# Altium PCB PCB1.PcbDoc
Units mm, origin at the board's own origin, x right, y up, seen from the top; angles counter-clockwise.
Board outline 59.05 x 107.06 mm, 2 copper layers (Top Layer, Bottom Layer); 64 components, 52 nets, 226 pads, 29 vias.
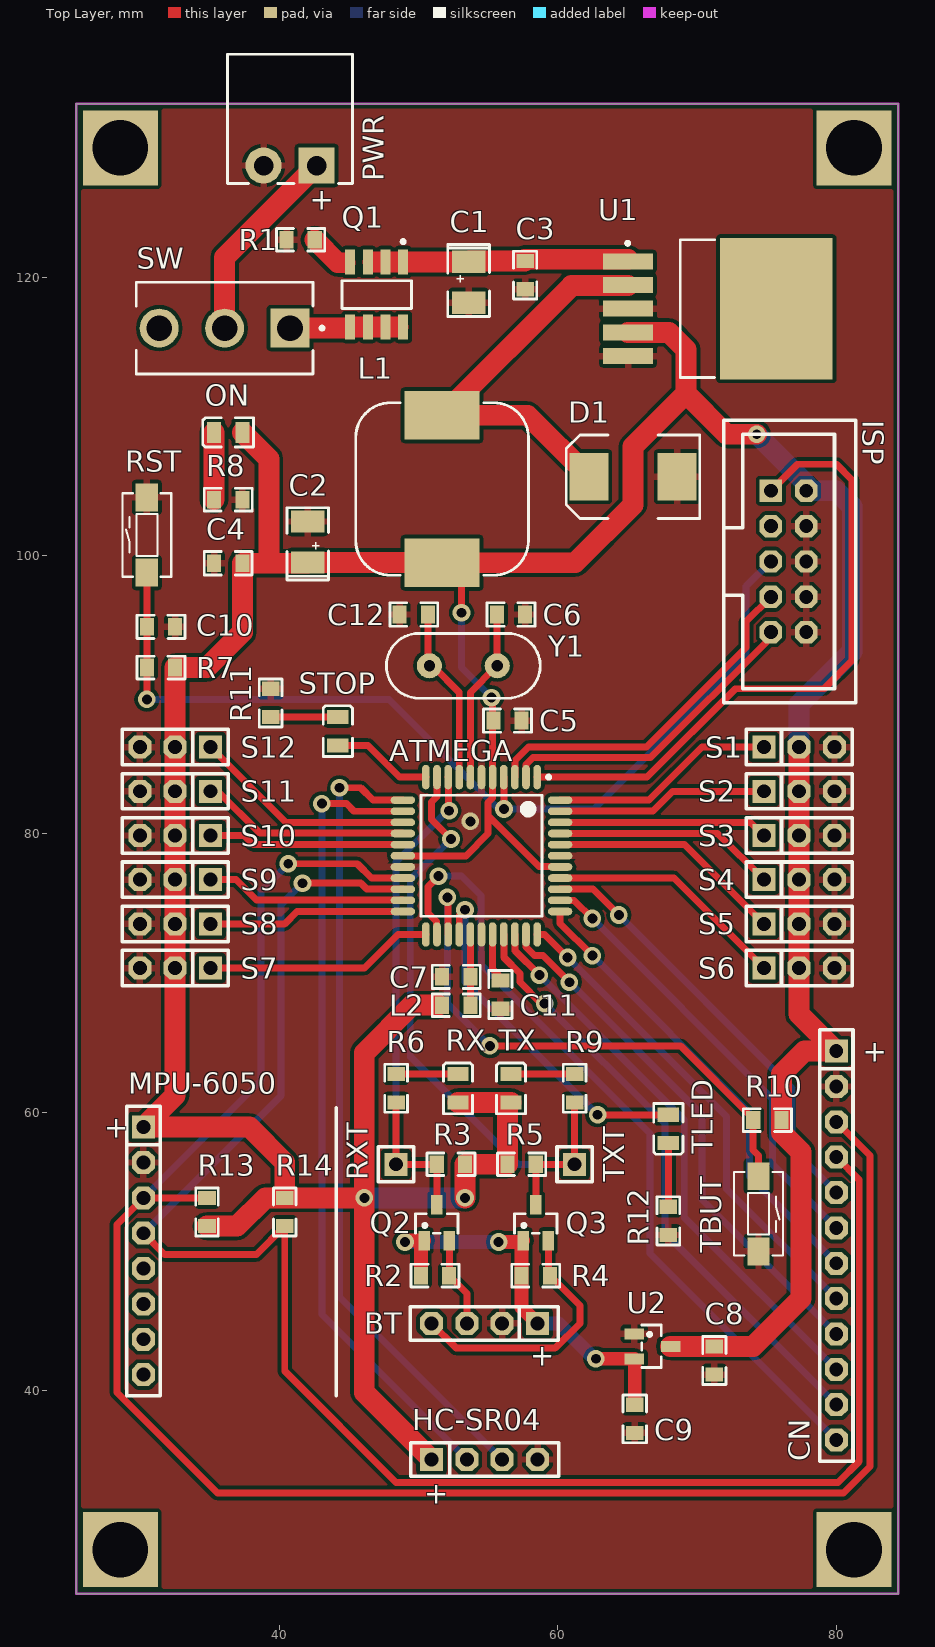
[diagram p0: Top Layer view]
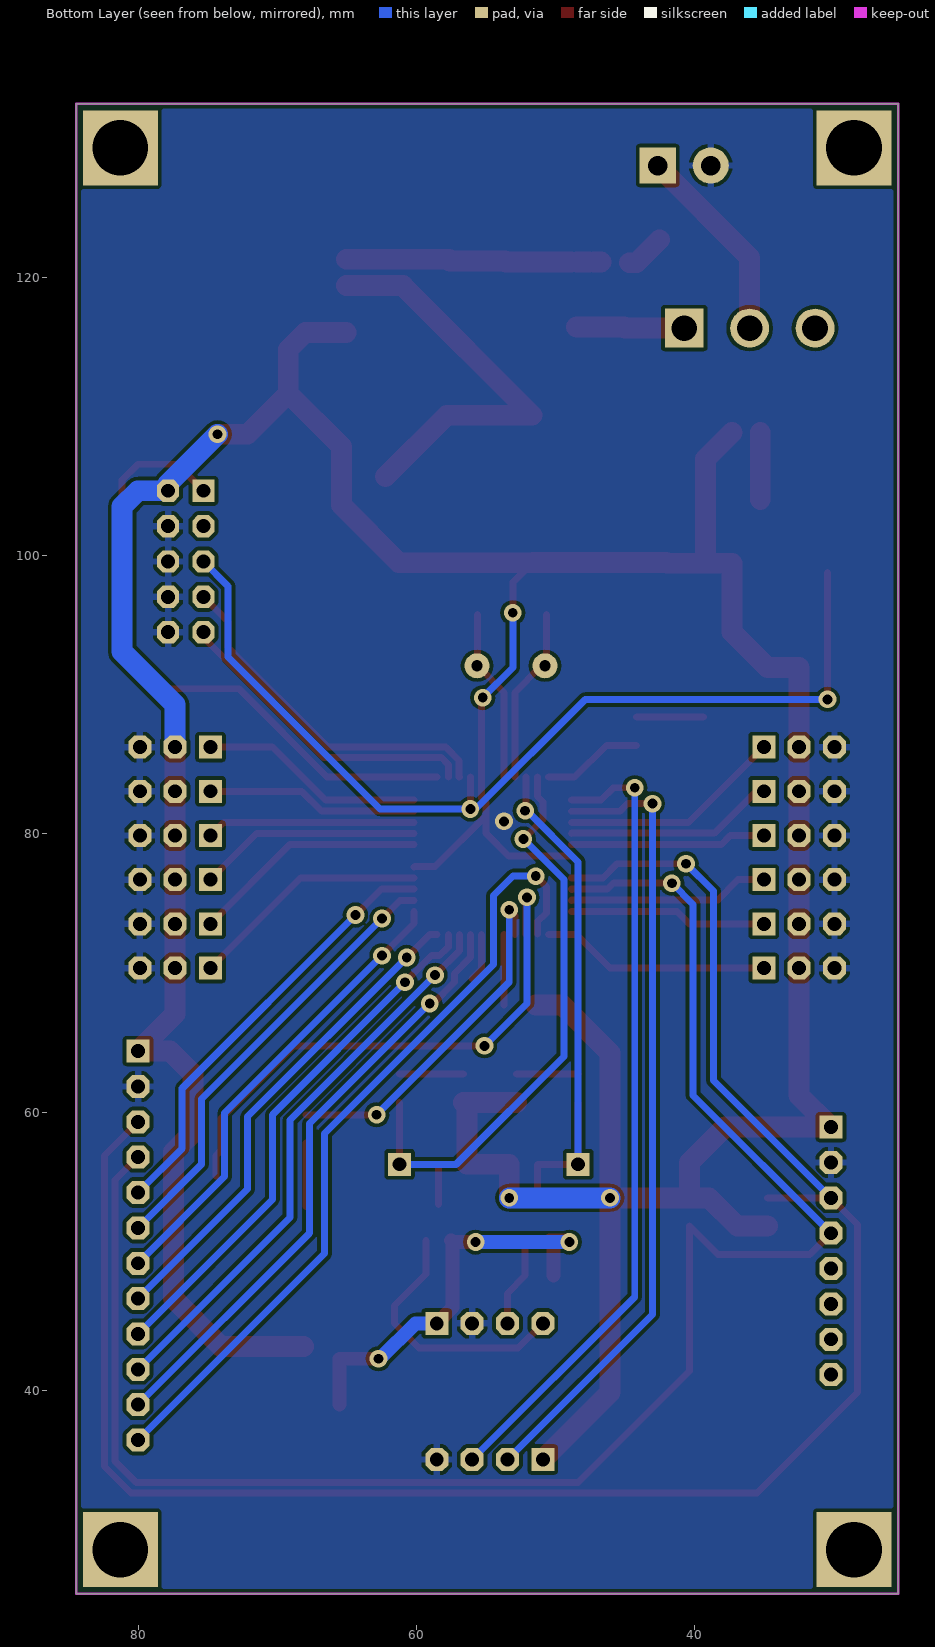
[diagram p1: Bottom Layer view, seen from below]
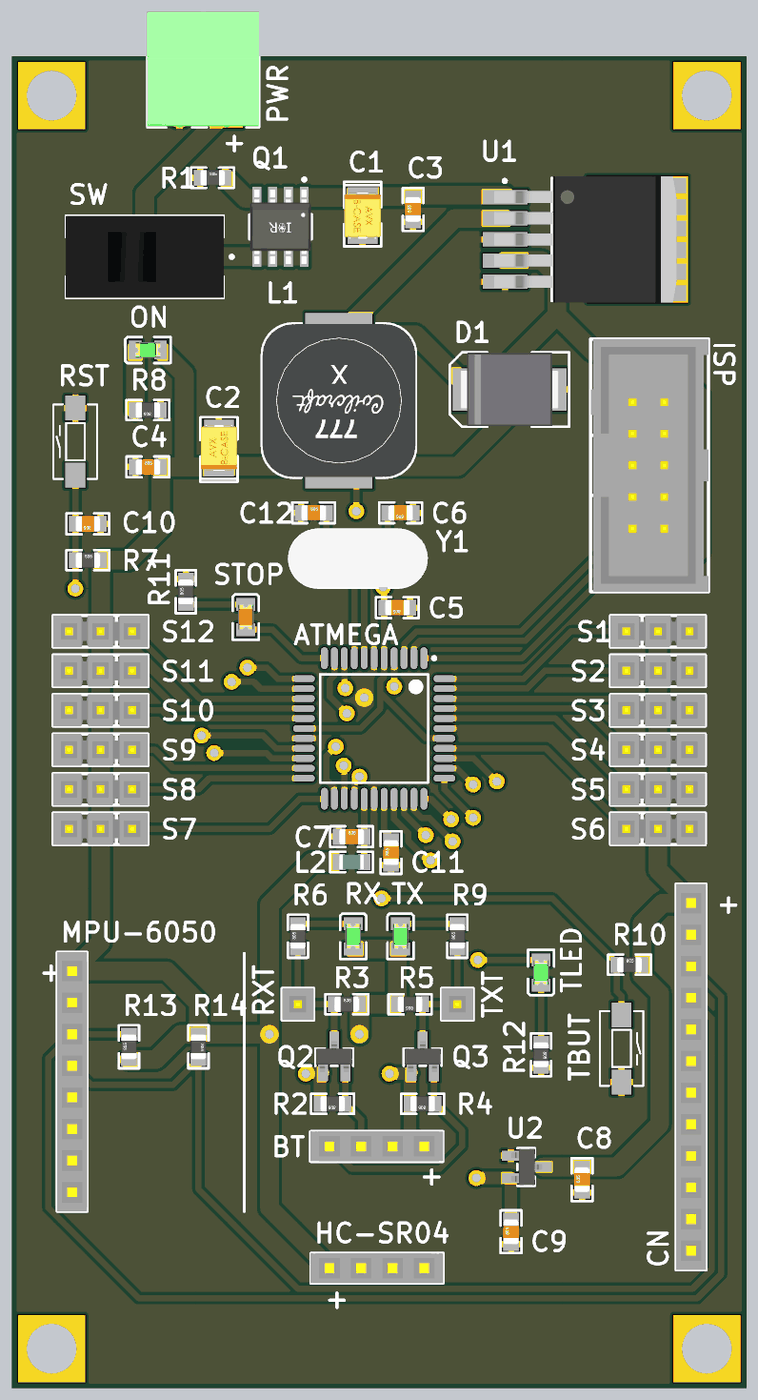
[diagram p2: 3D render of the assembled board from above, using the file's embedded part models]

## Layer stack, top to bottom
Top Solder: solder mask 0.0102, Solder Resist, Dk 3.5
Top Layer: signal copper 0.0356
Dielectric 1: dielectric 0.32, FR-4, Dk 4.8
Bottom Layer: signal copper 0.0356
Bottom Solder: solder mask 0.0102, Solder Resist, Dk 3.5

## Board outline
25.4,25.4 84.455,25.4 84.455,132.461 25.4,132.461

## Design rules (kind name [scope] priority, off if disabled: settings)
Clearance [All] p1: gap=0.254 ignorepadtopadclearanceinfootprint=FALSE except(0: Arc-Hole Track-Hole SMDPad-Hole THPad-Hole Via-Hole Fill-Hole Poly-Hole Region-Hole Text-Hole; 0.05: SMDPad-SMDPad)
HoleSize [All] p1: absolutevalues=TRUE maxlimit=5 minlimit=0.025 maxpercent=80.000 minpercent=20.000
MinimumSolderMaskSliver [All] p1: minsoldermaskwidth=0.04
PolygonConnect [All] p1: connectstyle=Relief reliefconductorwidth=0.5 reliefentries=4 polygonreliefangle="90 Angle" airgapwidth=0.254
RoutingVias [All] p1: holewidth=0.711 width=1.27 viastyle="Through Hole" minholewidth=0.711 minwidth=1.27 maxholewidth=0.711 maxwidth=1.27
SilkToSolderMaskClearance [IsPad] p1: minsilkscreentomaskgap=0.05 clearancetoexposedcopper=TRUE
SolderMaskExpansion [All] p1: expansion=0.102
Width [All] p1: maxlimit=1.5 minlimit=0.5 preferedwidth=1.5
27 further rules are at their usual default settings.

## Components (designator, comment, footprint, x,y, rotation, side; value= is the part's Value field where it differs from the comment)
ATMEGA "ATmega324PA-AU" 44A_N 54.521,78.424 r270 top
BT "CN_4x1" GP_4x1_F 58.547,44.831 r180 top
C1 "22uF" SMDB 53.594,119.634 r90 top
C2 "22uF" SMDB 42.037,100.965 r270 top
C3 "100nF" C0805 57.658,120.142 r90 top
C4 "*" C0805 36.322,99.441 r0 top
C5 "*" C0805 56.388,88.138 r180 top
C6 "22 pF" C0805 56.642,95.758 r180 top
C7 "*" C0805 52.705,69.723 r0 top
C8 "*" C0805 71.247,42.164 r90 top
C9 "*" C0805 65.532,37.973 r90 top
C10 "*" C0805 31.496,94.869 r180 top
C11 "*" C0805 55.88,68.453 r90 top
C12 "22 pF" C0805 49.657,95.758 r0 top
CN "CN_12x1" GP_12x1_F 80.01,64.389 r270 top (schematic designator CN1)
D1 "SK54C / SK84L-TP" SMC 65.405,105.664 r180 top
HC-SR04 "CN_4x1" GP_4x1_F 50.927,35.052 r0 top
ISP "IDC Connector" IDC10 76.581,99.568 r270 top
L1 "22uH, 5.0A" DE1209 51.689,104.775 r90 top
L2 "10uH" L0805 52.705,67.691 r0 top
MPU-6050 "CN_8x1" GP_8x1_F 30.226,58.928 r270 top
ON "LED" LED0805G 36.322,108.839 r180 top
PWR "15EDGRC-3.81/2P" 15EDGRC-3.81/2P_WO_CN 40.767,128.016 r180 top
Q1 "IRF7425PBF" Infineon_PG-DSO-8_MFG 46.99,118.745 r270 top
Q2 "BSS138" SOT-23 51.308,52.07 r0 top
Q3 "BSS138" SOT-23 58.42,52.07 r0 top
R1 "100k" R0805 41.529,122.682 r0 top
R2 "" R0805 51.181,48.26 r180 top
R3 "" R0805 52.324,56.261 r0 top
R4 "" R0805 58.42,48.26 r180 top
R5 "" R0805 57.404,56.261 r180 top
R6 "" R0805 48.387,61.722 r90 top
R7 "" R0805 31.496,91.948 r0 top
R8 "" R0805 36.322,104.013 r180 top
R9 "" R0805 61.214,61.722 r90 top
R10 "" R0805 75.057,59.436 r0 top
R11 "" R0805 39.37,89.408 r90 top
R12 "" R0805 67.945,52.197 r270 top
R13 "4k7" R0805 34.798,52.832 r90 top
R14 "4k7" R0805 40.386,52.832 r270 top
RST "DTSM31N" DTSM-3 30.48,101.473 r90 top
RX "LED" LED0805G 52.832,61.722 r90 top
RXT "CN_1x1" GP_1x1 48.387,56.261 r0 top
S1 "CN_3x1" GP_3x1 74.803,86.233 r0 top
S2 "CN_3x1" GP_3x1 74.803,83.058 r0 top
S3 "CN_3x1" GP_3x1 74.803,79.883 r0 top
S4 "CN_3x1" GP_3x1 74.803,76.708 r0 top
S5 "CN_3x1" GP_3x1 74.803,73.533 r0 top
S6 "CN_3x1" GP_3x1 74.803,70.358 r0 top
S7 "CN_3x1" GP_3x1 35.052,70.358 r180 top
S8 "CN_3x1" GP_3x1 35.052,73.533 r180 top
S9 "CN_3x1" GP_3x1 35.052,76.708 r180 top
S10 "CN_3x1" GP_3x1 35.052,79.883 r180 top
S11 "CN_3x1" GP_3x1 35.052,83.058 r180 top
S12 "CN_3x1" GP_3x1 35.052,86.233 r180 top
STOP "RED" LED0805R 44.196,87.376 r90 top
SW "Switch_C&K_1101M2S3CQE2_eec" C&K_1101M2S3CQE2_0 36.068,116.332 r180 top (schematic designator SW1)
TBUT "DTSM31N" DTSM-3 74.422,52.705 r270 top
TLED "GREEN" LED0805G 67.945,58.801 r270 top
TX "LED" LED0805G 56.642,61.722 r90 top
TXT "CN_1x1" GP_1x1 61.214,56.261 r0 top
U1 "AP1501A-50K5G-13" TO-263-5 71.501,117.729 r0 top
U2 "MCP1703T-3302E/CB" SOT-23 66.802,43.18 r270 top
Y1 "16 MHz" HC49-S 53.213,92.075 r180 top

## Footprints (in the part's own frame and the unit in brackets; to place one, negate y for a bottom-side part, rotate by r counter-clockwise, add the part's x,y. Pads: shape width x height; smd on the part's side, far side on the other; paste and mask are expansions set on the pad)
15EDGRC-3.81/2P_WO_CN [mm] "Degson 7A, 250V, 2 Pole Plug-in Terminal Block"
  rect 2.6x2.6 hole 1.4: 1(-1.905,0)
  round 2.6 hole 1.4: 2(1.905,0)
  silkscreen extent -4.49,-8 4.49,1.3, body extent -4.5,-8 4.5,1.3, height 7.25
44A_N [mm] "Thin QFP, 44-Leads, Body 10x10mm, Pitch 0.8mm, IPC Medium Density"
  oval 1.75x0.55 smd: 1(-5.65,4) 2(-5.65,3.2) 3(-5.65,2.4) 4(-5.65,1.6) 5(-5.65,0.8) 6(-5.65,0) 7(-5.65,-0.8) 8(-5.65,-1.6) 9(-5.65,-2.4) 10(-5.65,-3.2) 11(-5.65,-4) 23(5.65,-4) 24(5.65,-3.2) 25(5.65,-2.4) 26(5.65,-1.6) 27(5.65,-0.8) 28(5.65,0) 29(5.65,0.8) 30(5.65,1.6) 31(5.65,2.4) 32(5.65,3.2) 33(5.65,4)
  oval 0.55x1.75 smd: 12(-4,-5.65) 13(-3.2,-5.65) 14(-2.4,-5.65) 15(-1.6,-5.65) 16(-0.8,-5.65) 17(0,-5.65) 18(0.8,-5.65) 19(1.6,-5.65) 20(2.4,-5.65) 21(3.2,-5.65) 22(4,-5.65) 34(4,5.65) 35(3.2,5.65) 36(2.4,5.65) 37(1.6,5.65) 38(0.8,5.65) 39(0,5.65) 40(-0.8,5.65) 41(-1.6,5.65) 42(-2.4,5.65) 43(-3.2,5.65) 44(-4,5.65)
  silkscreen extent -5.77,-4.35 4.35,4.95, body extent -5,-5 5,5, height 1.2
C0805 [mil]
  rect 40x50 smd: 1(-40,0) 2(40,0)
  silkscreen extent -68,-33 68,33, body extent -39,-25 39,25, height 31
C&K_1101M2S3CQE2_0 [mm]
  rect 2.8x2.8 hole 1.85 paste-1000 mask+0: 1(-4.7,0)
  round 2.8 hole 1.85 paste-1000 mask+0: 2(0,0) 3(4.7,0)
  silkscreen extent -7.13,-3.3 6.35,3.3, body extent -6.45,-3.4 6.45,3.4, height 0.25
DE1209 [mm] "FERROCORE DE1209 (12x12mm)"
  rect 3.5x5.4 smd: 1(5.3,0) 2(-5.3,0)
  silkscreen extent -6.2,-6.2 6.2,6.2, body extent -6.15,-6.15 6.15,6.15, height 10.21
DTSM-3 [mm]
  rect 2x1.6 smd: 1(-2.7,0) 2(2.7,0)
  silkscreen extent -3,-1.75 3,1.75, body extent -3.6,-1.75 3.6,1.75, height 5
GP_1x1 [mil]
  rect 65x65 hole 39.37: 1(0,0)
  silkscreen extent -50,-50 50,50, body extent -50,-50 50,50, height 330
GP_3x1 [mil]
  rect 65x65 hole 39.37: 1(0,0)
  oct 65x65 hole 39.37: 2(100,0) 3(200,0)
  silkscreen extent -50,-50 250,50, body extent -50,-50 250,50, height 330
GP_4x1_F [mil]
  rect 65x65 hole 39.37: 1(0,0)
  oct 65x65 hole 39.37: 2(100,0) 3(200,0) 4(300,0)
  silkscreen extent -59,-47 360,47, body extent -60,-47 360,48, height 335
GP_8x1_F [mil]
  rect 65x65 hole 39.37: 1(0,0)
  oct 65x65 hole 39.37: 2(100,0) 3(200,0) 4(300,0) 5(400,0) 6(500,0) 7(600,0) 8(700,0)
  silkscreen extent -59,-47 760,47, body extent -60,-47 760,48, height 335
GP_12x1_F [mil]
  rect 65x65 hole 39.37: 1(0,0)
  oct 65x65 hole 39.37: 2(100,0) 3(200,0) 4(300,0) 5(400,0) 6(500,0) 7(600,0) 8(700,0) 9(800,0) 10(900,0) 11(1000,0) 12(1100,0)
  silkscreen extent -60,-47 1161,47, body extent -60,-48 1160,48, height 335
HC49-S [mm] "Crystal Oscillator"
  round 1.8 hole 0.8: 1(-2.44,0) 2(2.44,0)
  silkscreen extent -5.53,-2.32 5.53,2.32, body extent -5.62,-2.35 5.55,2.32, height 3.63
IDC10 [mm] "2.54mm, 10 Pin IDC Male Connector"
  rect 1.6x1.6 hole 1: 1(-5.08,-1.27)
  oct 1.6x1.6 hole 1: 2(-5.08,1.27) 3(-2.54,-1.27) 4(-2.54,1.27) 5(0,-1.27) 6(0,1.27) 7(2.54,-1.27) 8(2.54,1.27) 9(5.08,-1.27) 10(5.08,1.27)
  silkscreen extent -10.16,-4.64 10.16,4.83, body extent -10.16,-4.65 10.16,4.83, height 9.27
Infineon_PG-DSO-8_MFG [mm]
  rect 1.78x0.72 smd paste+0 mask+0: 1(-2.34,1.905) 2(-2.34,0.635) 3(-2.34,-0.635) 4(-2.34,-1.905) 5(2.34,-1.905) 6(2.34,-0.635) 7(2.34,0.635) 8(2.34,1.905)
  silkscreen extent -3.92,-2.5 1,2.5, body extent -3.33,-2.68 3.33,2.68, height 0.25
L0805 [mil]
  rect 40x50 smd: 1(-40,0) 2(40,0)
  silkscreen extent -68,-32 68,32, body extent -39,-24 39,24, height 37
LED0805G [mil]
  rect 40x60 smd: 1(-40,0) 2(40,0)
  silkscreen extent -72,-41 72,41, body extent -40,-25 40,25, height 43
LED0805R [mil]
  rect 40x60 smd: 1(-40,0) 2(40,0)
  silkscreen extent -72,-41 72,41, body extent -40,-25 40,25, height 43
R0805 [mil]
  rect 40x50 smd: 1(-40,0) 2(40,0)
  silkscreen extent -68,-32 68,32, body extent -39,-25 39,25, height 31
SMC [mm]
  rect 2.8x3.4 smd: 1(-3.175,0) 2(3.175,0)
  silkscreen extent -4.8,-3 4.8,3, body extent -3.98,-2.95 3.97,2.95, height 2.3
SMDB [mm] "SMDB"
  rect 1.6x2.4 smd: 1(1.476,0) 2(-1.475,0)
  silkscreen extent -2.46,-1.5 2.72,1.5, body extent -1.85,-1.46 1.85,1.46, height 2.03
SOT-23 [mm]
  rect 0.8x1.4 smd: 1(-0.9,-1.3) 2(0.9,-1.3) 3(0,1.3)
  silkscreen extent -1.52,-0.76 1.52,0.64, body extent -1.46,-1.25 1.46,1.23, height 1
TO-263-5 [mm] "D2-PAK, 6-Pads, Body 8,9x9,9mm (max), IPC Low Density"
  rect 3.6x1.15 smd: 1(-6.45,3.4) 2(-6.45,1.7) 3(-6.45,0) 4(-6.45,-1.7) 5(-6.45,-3.4)
  rect 8.1x10.15 smd paste-5: 6(4.2,0)
  silkscreen extent -6.6,-4.95 -0.25,4.95, body extent -7.31,-5.08 7.33,5.08, height 4.57

## Part data
ATMEGA: "8-bit AVR Microcontroller, 32KB Flash, 1KB EEPROM, 2KB SRAM, 44-pin TQFP, Industrial Grade (-40°C to 85°C)", Code_JEDEC=MS-026-ACB, ComponentLink1Description="Manufacturer URL", ComponentLink1URL=http://www.atmel.com/, ComponentLink2Description="ATmega164A/164PA/324A/324PA/644A/644PA/1284/1284P Datasheet", ComponentLink2URL=http://www.atmel.com/dyn/resources/prod_documents/doc8272.pdf, ComponentLink3Description="ATmega164A/164PA/324A/324PA/644A/644PA/1284/1284P Summary", ComponentLink3URL=http://www.atmel.com/dyn/resources/prod_documents/8272S.pdf, DatasheetVersion="revC, Jun-2011", PackageDescription="44-Pin Plastic Thin Profile Quad Flat Pack, 10 x 10 x 1.0 mm Body, 0.8 mm Pitch (TQFP)", PackageReference=44A, PackageVersion="revC, Oct-2010"
C1 C2: library part "Cap Pol Tant", "Polarized Tantalum Capacitor", ComponentLink1Description=datasheet, ComponentLink2Description=supplier
C3 C4 C5 C6 C7 C8 C9 C10 C11 C12: library part Cap, "Capacitor", ComponentLink1Description=datasheet, ComponentLink2Description=supplier
D1: library part SK54C, "Schottky Diode: 40V, 5A", Supplier Part Number 1=1299291, PackageReference=SOT-23, Published=08-Mar-2006, Supplier 1=Farnell
ISP: library part CN_5x2
L1: library part DE1209-22, "DE1209-22", ComponentLink1Description=datasheet, ComponentLink2Description=supplier, Published=08-Mar-2006, Supplier 1=TME, Supplier Part Number 1=DE1209-22
L2: library part Ind2, "Inductor", ComponentLink1Description=datasheet, ComponentLink2Description=supplier, Published=19-Feb-2006
ON RX TX: "Typical RED, GREEN, YELLOW, AMBER GaAs LED", Published=04-Apr-2006
PWR: "Degson 7A, 250V, 2 Pole Plug-in Terminal Block", link=https://www.tme.eu/pl/details/15edgk3.81-02p/listwy-zaciskowe-rozlaczalne/degson-electronics/15edgk-3-81-02p-14-00a-h/
Q2 Q3: "N-Channel Enhancement Mode Vertical DMOS FET", ComponentLink1Description="Manufacturer Link", ComponentLink1URL=http://www.zetex.com/, ComponentLink2Description=Datasheet, ComponentLink2URL=www.zetex.com/3.0/pdf/BSS138.pdf, DatasheetVersion=Mar-96, PackageDescription="SOT-23; 3 Leads; Body 3.1 x 2.5 mm, inc. leads (LxW max), Alternate Lead Configuration", PackageReference=SOT23, PackageVersion=1996, Published=17-Dec-2003, Publisher="Altium Limited"
R1 R2 R3 R4 R5 R6 R7 R8 R9 R10 R11 R12 R13 R14: library part Res, "Resistor", ComponentLink1Description=datasheet, ComponentLink2Description=supplier, Published=19-Feb-2006
RST TBUT: "DIPTRONICS 6x3,5mm SMD Tactile SPST-NO Switch"
STOP: library part LED_RED, "RED LED", Published=04-Apr-2006
SW: "SWITCH SLIDE SPDT 6A 120V", Digikey Part Number=CKN5001-ND, Manufacturer=C&K, Mouser Part Number=611-1101M2S3CQE2, Package=CONN_PTH_BNC, Part Number=1101M2S3CQE2, Temperature="-30° to +65°", Temperature Range High=+65°, Temperature Range Low=-30°, ComponentLink1Description=Upverter, ComponentLink1URL=https://upverter.com/upn/revision/403d1beb71d14239/, ComponentLink2Description=Datasheet, ComponentLink2URL=https://upverter.com/datasheet/a7139684b05aeea94593aa7ac14a507e079abd51.pdf, Digikey Description="SWITCH SLIDE SPDT 6A 120V", helpURL=https://upverter.com/upn/revision/403d1beb71d14239/, Lead Free=yes, Price=2.74673798286, RoHS=TRUE, Supplier 1=Digi-Key, Supplier 2=Mouser, Supplier Part Number 1=CKN5001-ND, Supplier Part Number 2=611-1101M2S3CQE2
TLED: library part LED_GREEN, "GREEN LED", Published=04-Apr-2006
U1: library part AP1501A-33K5G-13, "Voltage stabiliser; PMIC; 5A; TO263-5; SMD; buck; -20A·85Â°C; 800pcs.", Package=None, Availability=Unavailable, MP=AP1501A-50K5G-13, Price=None
U2: "250 mA, 16V, Low Quiescent Current LDO Regulator, 3-Pin SOT-23A, Extended Temperature, Tape and Reel", DatasheetVersion="revD, Sep-2009", PackageDescription="3-Lead Plastic Small Outline Transistor (CB) [SOT-23A]", PackageReference=SOT-23A-CB3, PackageVersion="revBB, Aug-2009", PartNumber=MCP1703T-3302E/CB
Y1: library part XTAL_2PIN, "Crystal Oscillator", ComponentLink1Description=datasheet, ComponentLink2Description=supplier
Q1: inny trans=https://www.tme.eu/pl/details/dmp3036sss-13/tranzystory-z-kanalem-p-smd/diodes-incorporated/, jeszcze inny trans=https://www.tme.eu/pl/details/ao4447a/tranzystory-z-kanalem-p-smd/alpha-omega-semiconductor/, link=https://www.tme.eu/pl/details/irf7425trpbf/tranzystory-z-kanalem-p-smd/infineon-technologies/

## Free pads (board coordinates)
  rect 5.4x5.4 hole 4: 1(28.575,28.575) 1(28.575,129.286) 1(81.28,28.575) 1(81.28,129.286)

## Via types
v1: diameter 1.27, hole 0.711, Top Layer to Bottom Layer, 29 vias

## Nets (pads, with @x,y where several pads share a name; then routed paths per layer and width w, separated by ;. In a path a pad name is that pad's centre, name@x,y a point inside that pad or via, vN(x,y) a via of type N, cw(c..) or ccw(c..) an arc to the next point about the centre after c; other vN are vias at no path point)
3V3: BT.1 C9.2 Q2.1 Q3.1 R2.2 R4.2 U2.2 | length 30.2
  Top Layer w1: v1(49.022,50.673) 49.119,50.77 Q2.1 50.165,50.527 R2.2 ; v1(55.753,50.673) Q3.1@57.423,50.673 ; Q3.1 Q3.1@57.423,50.673 ; BT.1 57.404,45.974 R4.2 57.404,50.654 Q3.1@57.423,50.673 ; v1(62.738,42.291) 65.521,42.291 65.532,42.28 C9.2
  Bottom Layer w1: v1(49.022,50.673) v1(55.753,50.673) ; BT.1 60.071,44.831 62.611,42.291 v1(62.738,42.291)
5V: ATMEGA.5 ATMEGA.17 ATMEGA.38 C2.1 C4.2 C5.2 C8.2 CN.1 HC-SR04.1 ISP.2 L1.2 L2.1 MPU-6050.1 ON.1 R3.2 R5.2 R7.2 R10.2 R13.1 R14.1 RX.1 S1.2 S2.2 S3.2 S4.2 S5.2 S6.2 S7.2 S8.2 S9.2 S10.2 S11.2 S12.2 TX.1 U1.4 U2.3 | length 311
  Top Layer w0.5: ATMEGA.17 53.405,78.424 54.995,80.014 54.995,81.316 ; L1.2 53.086,98.078 v1(53.086,95.885) ; v1(55.245,89.789) 55.321,89.713 ATMEGA.5 55.321,82.586 54.995,82.26 54.995,81.316 ; ATMEGA.38 60.15,77.645 58.666,77.645 54.995,81.316
  Top Layer w1.5: R13.1 36.957,51.816 38.989,53.848 R14.1 v1(46.101,53.848) ; ON.1 39.243,106.934 39.243,99.441 ; R14.1@40.386,54.102 40.386,56.388 37.846,58.928 MPU-6050.1 32.512,61.214 S7.2 S8.2 S9.2 S10.2 S11.2 S12.2 R7.2 34.798,91.948 37.338,94.488 C4.2 39.243,99.441 ; HC-SR04.1 46.101,39.878 v1(46.101,53.848) ; L2.1@51.435,67.691 49.53,67.691 46.101,64.262 v1(46.101,53.848) ; RX.1 TX.1 56.388,60.452 R5.2 R3.2 v1(53.34,53.848) ; U1.4 67.994,116.029 69.215,114.808 69.215,111.633 ; U2.3 C8.2 74.041,43.18 77.47,46.609 77.47,57.15 76.073,58.547 R10.2 76.073,62.738 77.724,64.389 CN.1 77.343,67.056 S6.2 S5.2 S4.2 S3.2 S2.2 S1.2 ; v1(74.295,108.712) 72.136,108.712 69.215,111.633 ; 39.243,99.441 41.989,99.441 C2.1 51.675,99.489 L1.2 61.248,99.475 65.405,103.632 65.405,107.823 69.215,111.633
  Bottom Layer w0.5: v1(53.086,95.885) 53.086,91.948 v1(55.245,89.789)
  Bottom Layer w1.5: v1(46.101,53.848) v1(53.34,53.848) ; v1(74.295,108.712) 77.851,105.156 ISP.2 80.01,104.648 81.153,103.505 81.153,93.091 77.343,89.281 S1.2
AVCC: ATMEGA.27 C7.2 L2.2 | length 5.1
  Top Layer w0.5: L2.2 C7.2 ATMEGA.27
BT_RX: BT.4 Q3.2 R4.1 | length 19
  Top Layer w0.5: BT.4 52.705,43.053 59.817,43.053 61.595,44.831 61.595,46.101 R4.1 59.32,48.376 Q3.2
BT_TX: BT.3 Q2.2 R2.1 | length 6.5
  Top Layer w0.5: Q2.2 52.208,48.271 R2.1 53.467,46.99 BT.3
E1: ATMEGA.36 CN.5 | length 31.4
  Top Layer w0.5: ATMEGA.36 62.533,76.024 v1(64.389,74.168)
  Bottom Layer w0.5: v1(64.389,74.168) 76.835,61.722 76.835,57.404 CN.5
E2: ATMEGA.35 CN.6 | length 32.3
  Top Layer w0.5: ATMEGA.35 61.174,75.224 v1(62.484,73.914)
  Bottom Layer w0.5: v1(62.484,73.914) 75.438,60.96 75.438,56.261 CN.6
E3: ATMEGA.34 CN.7 | length 33.5
  Top Layer w0.5: ATMEGA.34 60.171,73.56 v1(62.484,71.247)
  Bottom Layer w0.5: v1(62.484,71.247) 73.787,59.944 73.787,55.372 CN.7
E4: ATMEGA.33 CN.8 | length 35.4
  Top Layer w0.5: ATMEGA.33 59.052,72.774 v1(60.706,71.12)
  Bottom Layer w0.5: v1(60.706,71.12) 72.136,59.69 72.136,54.483 CN.8
E5: ATMEGA.32 CN.9 | length 38.3
  Top Layer w0.5: ATMEGA.32 57.721,71.869 58.343,71.247 58.928,71.247 v1(60.833,69.342)
  Bottom Layer w0.5: v1(60.833,69.342) 70.358,59.817 70.358,53.721 CN.9
E6: ATMEGA.31 CN.10 | length 40.8
  Top Layer w0.5: ATMEGA.31 56.921,71.603 v1(58.674,69.85)
  Bottom Layer w0.5: v1(58.674,69.85) 69.088,59.436 69.088,52.451 CN.10
E7: ATMEGA.30 CN.11 | length 43.8
  Top Layer w0.5: ATMEGA.30 56.121,71.133 57.277,69.977 57.277,69.342 58.801,67.818 v1(59.055,67.818)
  Bottom Layer w0.5: v1(59.055,67.818) 67.691,59.182 67.691,51.308 CN.11
E8: ATMEGA.24 CN.12 | length 58.1
  Top Layer w0.5: ATMEGA.24@51.3,72.795 51.3,73.697 50.673,74.324 50.673,76.2 v1(51.435,76.962)
  Bottom Layer w0.5: v1(51.435,76.962) 53.086,76.962 54.483,75.565 54.483,70.612 66.611,58.483 66.611,49.847 CN.12
ECHO: ATMEGA.12 HC-SR04.3 | length 58
  Top Layer w0.5: v1(44.323,83.312) 45.847,83.312 46.735,82.424 ATMEGA.12
  Bottom Layer w0.5: v1(44.323,83.312) 44.323,46.736 HC-SR04.3
GND: ATMEGA.6 ATMEGA.18 ATMEGA.28 ATMEGA.39 BT.2 C1.2 C2.2 C3.1 C4.1 C5.1 C6.1 C7.1 C8.1 C9.1 C10.1 C11.1 C12.1 CN.2 D1.1 HC-SR04.4 ISP.4 ISP.6 ISP.8 ISP.10 MPU-6050.2 PWR.2 R1.1 R8.1 R11.2 R12.2 RST.2 S1.3 S2.3 S3.3 S4.3 S5.3 S6.3 S7.3 S8.3 S9.3 S10.3 S11.3 S12.3 TBUT.2 U1.3 U1.5 U2.1
  other v1: 53.721,80.899
MISO: ATMEGA.2 ISP.9 | length 22.7
  Top Layer w0.5: ATMEGA.2 57.721,84.976 58.216,85.471 66.675,85.471 75.311,94.107 ISP.9
MOSI: ATMEGA.1 ISP.1 | length 46.2
  Top Layer w0.5: ATMEGA.1 66.421,84.074 72.771,90.424 79.121,90.424 81.153,92.456 81.153,105.41 80.01,106.553 77.216,106.553 ISP.1
NetATMEGA_29: ATMEGA.29 C11.2 | length 3.5
  Top Layer w0.5: ATMEGA.29 55.321,70.282 C11.2@56.007,69.596
NetC1_1: C1.1 C3.2 Q1.1 Q1.2 Q1.3 U1.1 | length 17.7
  Top Layer w1.5: 46.736,121.085 47.244,121.085 ; Q1.2 48.514,121.085 ; Q1.1 53.569,121.085 C1.1 53.652,121.167 57.625,121.167 57.658,121.285 U1.1@65.051,121.285
NetD1_2: D1.2 L1.1 U1.2 | length 29.6
  Top Layer w1.5: D1.2 57.819,110.075 L1.1 60.984,119.37 60.984,119.404 U1.2@65.051,119.404
NetON_2: ON.2 R8.2 | length 4.8
  Top Layer w1.5: R8.2 ON.2
NetPWR_1: PWR.1 SW.2 | length 14.4
  Top Layer w1.5: SW.2 36.068,121.412 PWR.1
NetQ1_4: Q1.4 R1.2 | length 2.8
  Top Layer w1.5: R1.2 44.196,121.031 44.704,121.031
NetQ1_5: Q1.5 Q1.6 Q1.7 Q1.8 SW.1 | length 7.8
  Top Layer w1.5: SW.1 45.012,116.332 Q1.5 Q1.6 Q1.7 48.514,116.405
NetR6_2: R6.2 RX.2 | length 4.4
  Top Layer w0.5: R6.2 RX.2
NetR9_2: R9.2 TX.2 | length 4.6
  Top Layer w0.5: TX.2 R9.2
NetR11_1: R11.1 STOP.2 | length 4.8
  Top Layer w0.5: R11.1 STOP.2
NetR12_1: R12.1 TLED.2 | length 4.6
  Top Layer w0.5: R12.1 TLED.2
RESET: ATMEGA.4 C10.2 ISP.5 R7.1 RST.1 | length 69.8
  Top Layer w0.5: v1(30.48,89.662) R7.1 C10.2 RST.1 ; ATMEGA.4 56.134,84.061 v1(56.134,81.788)
  Bottom Layer w0.5: v1(30.48,89.662) 47.879,89.662 55.753,81.788 v1(56.134,81.788) 62.611,81.788 73.533,92.71 73.533,97.79 ISP.5
RX: ATMEGA.9 Q2.3 R3.1 R6.1 RXT.1 | length 39.8
  Top Layer w0.5: R6.1 RXT.1 R3.1 Q2.3 ; ATMEGA.9 52.142,84.053 52.142,81.716 v1(52.197,81.661)
  Bottom Layer w0.5: RXT.1 48.387,77.978 52.07,81.661 v1(52.197,81.661)
SCK: ATMEGA.3 ISP.7 | length 25.5
  Top Layer w0.5: ATMEGA.3 56.942,84.074 56.942,85.263 57.904,86.225 66.363,86.225 73.533,93.395 73.533,95.25 ISP.7
SCL: ATMEGA.19 CN.3 MPU-6050.3 R13.2 | length 140
  Top Layer w0.5: R13.2 MPU-6050.3 28.321,51.943 28.321,39.878 35.552,32.647 80.526,32.647 82.423,34.544 82.423,56.896 CN.3 ; v1(40.64,77.851) 45.593,77.851 46.62,76.824 ATMEGA.19
  Bottom Layer w0.5: MPU-6050.3 38.672,62.293 38.672,75.882 v1(40.64,77.851)
SDA: ATMEGA.20 CN.4 MPU-6050.4 R14.2 | length 127.1
  Top Layer w0.5: MPU-6050.4 31.75,49.784 38.354,49.784 R14.2 40.386,41.402 48.387,33.401 80.137,33.401 81.661,34.925 81.661,55.118 CN.4 ; v1(41.656,76.454) 45.847,76.454 46.277,76.024 ATMEGA.20 ATMEGA.20@48.85,76.003
  Bottom Layer w0.5: MPU-6050.4 40.132,61.214 40.132,74.93 v1(41.656,76.454)
SERVO1: ATMEGA.44 S1.1 | length 16.2
  Top Layer w0.5: ATMEGA.44 66.549,82.424 70.358,86.233 S1.1
SERVO2: ATMEGA.43 S2.1 | length 15.2
  Top Layer w0.5: ATMEGA.43 60.192,81.645 66.836,81.645 68.249,83.058 S2.1
SERVO3: ATMEGA.42 S3.1 | length 15
  Top Layer w0.5: ATMEGA.42 73.862,80.824 S3.1
SERVO4: ATMEGA.41 S4.1 | length 16
  Top Layer w0.5: ATMEGA.41 71.487,80.024 S4.1
SERVO5: ATMEGA.40 S5.1 | length 17
  Top Layer w0.5: ATMEGA.40 69.112,79.224 S5.1
SERVO6: ATMEGA.37 S6.1 | length 17.3
  Top Layer w0.5: ATMEGA.37 68.337,76.824 S6.1
SERVO7: ATMEGA.23 S7.1 | length 16.5
  Top Layer w0.5: S7.1 46.101,70.358 48.517,72.774 ATMEGA.23
SERVO8: ATMEGA.22 S8.1 | length 14.2
  Top Layer w0.5: S8.1 40.384,73.533 41.275,74.424 ATMEGA.22
SERVO9: ATMEGA.21 S9.1 | length 14.4
  Top Layer w0.5: S9.1 36.891,76.708 38.354,75.245 48.85,75.245 ATMEGA.21
SERVO10: ATMEGA.16 S10.1 | length 14.1
  Top Layer w0.5: S10.1 37.462,79.883 38.1,79.245 48.85,79.245 ATMEGA.16
SERVO11: ATMEGA.15 S11.1 | length 15.1
  Top Layer w0.5: S11.1 35.595,83.058 38.608,80.045 48.85,80.045 ATMEGA.15
SERVO12: ATMEGA.14 S12.1 | length 16.1
  Top Layer w0.5: S12.1 40.461,80.824 ATMEGA.14
STOP_LED: ATMEGA.11 STOP.1 | length 7.3
  Top Layer w0.5: STOP.1 46.355,86.36 48.641,84.074 ATMEGA.11
TEST_BUT: ATMEGA.25 R10.1 TBUT.1 | length 40
  Top Layer w0.5: v1(52.07,75.438) 52.121,75.387 ATMEGA.25 ; v1(55.118,64.77) 68.834,64.77 74.041,59.563 R10.1 74.041,57.277 74.422,56.896 TBUT.1
  Bottom Layer w0.5: v1(52.07,75.438) 52.07,67.818 v1(55.118,64.77)
TEST_LED: ATMEGA.26 TLED.1 | length 25.7
  Top Layer w0.5: ATMEGA.26 52.921,74.13 v1(53.34,74.549) ; v1(62.865,59.817) TLED.1
  Bottom Layer w0.5: v1(53.34,74.549) 53.34,69.342 v1(62.865,59.817)
TRIG: ATMEGA.13 HC-SR04.2 | length 57.5
  Top Layer w0.5: v1(43.053,82.169) 44.831,82.169 45.376,81.624 ATMEGA.13
  Bottom Layer w0.5: v1(43.053,82.169) 43.053,45.466 HC-SR04.2
TX: ATMEGA.10 Q3.3 R5.1 R9.1 TXT.1 | length 47.2
  Top Layer w0.5: ATMEGA.10 51.321,82.69 50.927,82.296 50.927,81.026 v1(52.324,79.629) ; Q3.3 R5.1 TXT.1 R9.1
  Bottom Layer w0.5: v1(52.324,79.629) 49.403,76.708 49.403,64.008 57.15,56.261 TXT.1
XTAL1: ATMEGA.8 C12.2 Y1.2 | length 12.4
  Top Layer w0.5: C12.2 50.673,92.175 Y1.2 ; Y1.2@51.116,91.975 52.921,90.17 ATMEGA.8
XTAL2: ATMEGA.7 C6.2 Y1.1 | length 12.4
  Top Layer w0.5: ATMEGA.7 53.721,90.17 55.526,91.975 Y1.1@55.526,92.075 ; C6.2 55.626,92.102 Y1.1
pads on no net: ISP.3 MPU-6050.5 MPU-6050.6 MPU-6050.7 MPU-6050.8 SW.3 U1.6

## Polygon pours and split planes (outlines as drawn)
GND on Top Layer "Top Layer-GND" (solid, pour order 0): 25.4,132.461 84.455,132.461 84.455,25.654 84.201,25.4 25.4,25.4
GND on Bottom Layer "Bottom Layer-GND" (solid, pour order 2): 25.4,132.461 84.455,132.461 84.455,25.4 25.4,25.4

## Keep-outs
Keep-Out Layer:
  the board outline again, w0.2

## Silkscreen, mask and mechanical layers (free items; w line width, h text height)
Top Overlay:
  lines w0.254: 44.069,39.624 44.069,60.325
  text "+" at 42.164,124.841 h1.52
  text "+" at 81.915,63.627 h1.52
  text "+" at 27.432,58.166 h1.52
  text "+" at 58.039,41.783 h1.52
  text "+" at 50.419,31.877 h1.52